# EAGLE board Helloworldbrd1 (EAGLE 7.5.0)

Size 100 x 80 mm. Coordinates in mm from the lower left corner, seen from the top.
Outline: 0,0 100,0 100,80 0,80 0,0
Copper layers (1*16): Top 0.035mm / dielectric 1.5mm / Bottom 0.035mm
Design rules "default": minimum track width 10mil, minimum drill 24mil, track to track 8mil, track to pad 8mil, pad to pad 8mil, via to via 8mil, smd to smd 8mil, copper to edge 40mil, drill to drill 8mil, minimum pad ring 10mil, minimum via ring 8mil, stop-mask expansion 4mil, vias tented up to drill 0mil, thermal gap 10mil

## Footprints (pad centres in the part's own frame; a part is rotated, then mirrored left to right if it is on the bottom)
C1206FAB = smd 1.27 x 1.905: 1 -1.651,0; 2 1.651,0
SOIC14 = smd 0.61 x 2.21: 1 -3.81,-2.603; 2 -2.54,-2.603; 3 -1.27,-2.603; 4 0,-2.603; 5 1.27,-2.603; 6 2.54,-2.603; 7 3.81,-2.603; 8 3.81,2.603; 9 2.54,2.603; 10 1.27,2.603; 11 0,2.603; 12 -1.27,2.603; 13 -2.54,2.603; 14 -3.81,2.603
1X06-SMD = smd 1 x 3: 1 -6.35,5; 2 -3.81,5; 3 -1.27,5; 4 1.27,5; 5 3.81,5; 6 6.35,5 | hole 1.4: -5.08,0; 5.08,0
R1206 = smd 1.6 x 1.803: 1 -1.422,0; 2 1.422,0
6MM_SWITCH = smd 2.286 x 1.524: 1 -3.302,2.286; 2 3.302,2.286; 3 -3.302,-2.286; 4 3.302,-2.286
2X03SMD = smd 2.54 x 1.27: 1 -2.54,2.54; 2 2.92,2.54; 3 -2.54,0; 4 2.92,0; 5 -2.54,-2.54; 6 2.92,-2.54
EFOBM = smd 0.8 x 3.9: 1 -1.35,0; 2 0,0; 3 1.35,0
LED1206 = smd 1.6 x 1.803: 1 -1.422,0; 2 1.422,0

## Placement (x,y rotation side)
C1  1UF  [C1206FAB]  31.75,24.13 180 top
IC1  ATTINY44-SSU  [SOIC14]  25.4,35.56 180 top
JP1  [1X06-SMD]  3.81,33.02 270 top
R1  10k  [R1206]  29.21,49.53 0 top
R2  499  [R1206]  21.59,44.45 180 top
S1  [6MM_SWITCH]  13.97,53.34 0 top
U$1  AVRISPSMD  [2X03SMD]  20.32,25.4 270 top
U$2  RESONATOR  [EFOBM]  29.21,43.18 90 top
U$3  LED  [LED1206]  12.7,44.45 180 top

## Library data of the parts
C1 IC1 R1 R2 S1 U$1-U$3 = fab
JP1 = SparkFun

## Nets
BUTTON: IC1.10 S1.1 S1.2
CTS: JP1.5
GND: C1.2 IC1.14 JP1.6 S1.3 S1.4 U$1.6 U$2.2 U$3.2
LED: IC1.6 R2.2
MISO: IC1.8 U$1.1
MOSI: IC1.7 U$1.4
N$2: IC1.2 U$2.1
N$3: R2.1 U$3.1
N$4: IC1.3 U$2.3
RST: IC1.4 R1.1 U$1.5
RTS: JP1.1
RX: IC1.12 JP1.2
SCK: IC1.9 U$1.3
TX: IC1.13 JP1.3
VCC: C1.1 IC1.1 JP1.4 R1.2 U$1.2

## Tracks (layer width: path | path; a pad name or v marks a point on that pad's centre or on a via)
BUTTON  (2 unrouted)
GND  (7 unrouted)
LED  (1 unrouted)
MISO  (1 unrouted)
MOSI  (1 unrouted)
N$2  (1 unrouted)
N$3  (1 unrouted)
N$4  (1 unrouted)
RST  (2 unrouted)
RX  (1 unrouted)
SCK  (1 unrouted)
TX  (1 unrouted)
VCC  (4 unrouted)